# EAGLE board simplePDwithBatteryv1 (EAGLE 7.5.0)
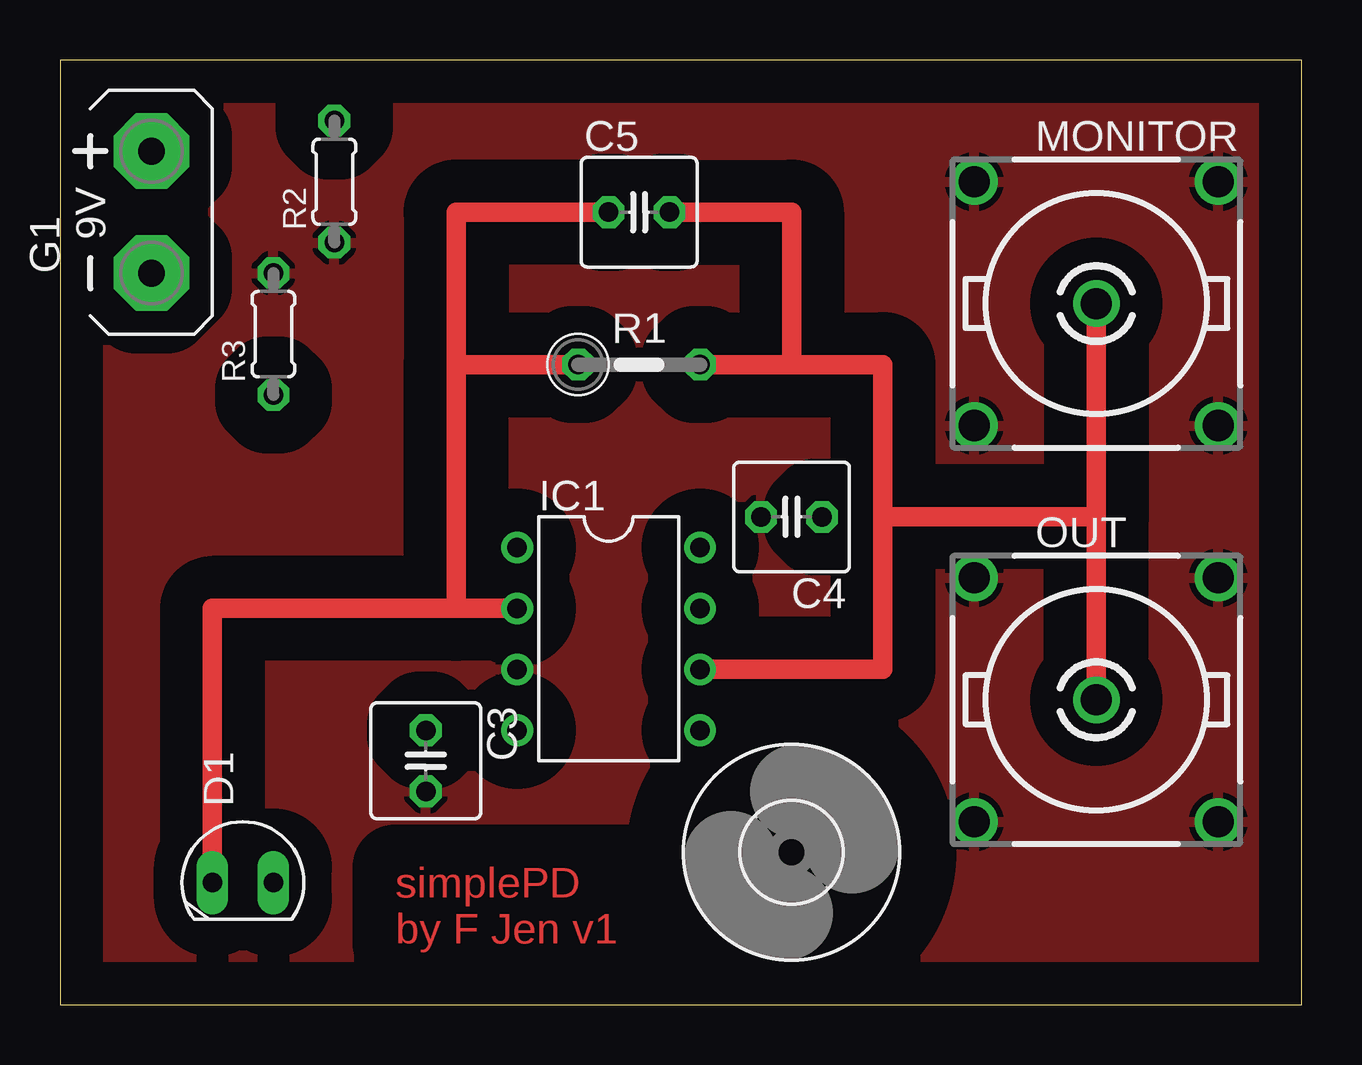
[diagram p0: board, top side]
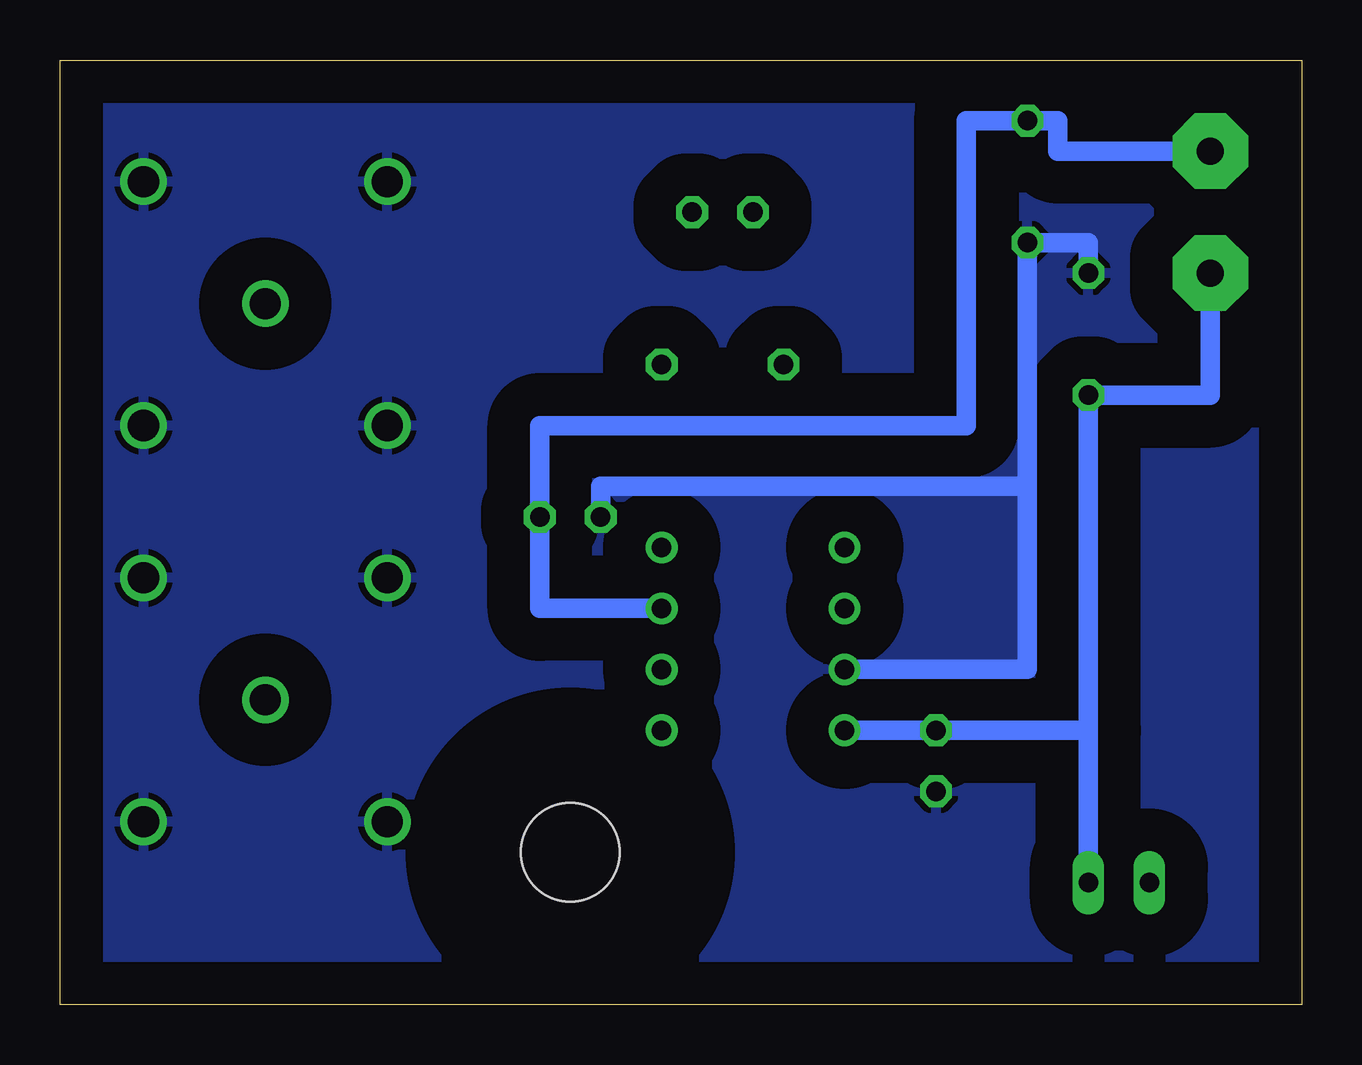
[diagram p1: board, bottom side, seen from below]

Size 51.74 x 39.36 mm. Coordinates in mm from the lower left corner, seen from the top.
Outline: 0,0 51.74,0 51.74,39.36 0,39.36 0,0
Copper layers (1*16): Top 0.035mm / dielectric 1.5mm / Bottom 0.035mm
Design rules "default": minimum track width 10mil, minimum drill 24mil, track to track 8mil, track to pad 8mil, pad to pad 8mil, via to via 8mil, smd to smd 8mil, copper to edge 40mil, drill to drill 8mil, minimum pad ring 10mil, minimum via ring 8mil, stop-mask expansion 4mil, vias tented up to drill 0mil, thermal gap 10mil

## Footprints (pad centres in the part's own frame; a part is rotated, then mirrored left to right if it is on the bottom)
C025-050X050 = drill 0.813 octagon: 1 -1.27,0; 2 1.27,0
SFH205 = drill 0.813 long: A 0,-1.27; K 0,1.27
AB9V = drill 1.118 pad 3.15 octagon: + 0,2.54; - 0,-2.54
4,1 = hole 4.1: 0,0
DIL08 = drill 0.813 pad 1.27: 1 -3.81,-3.81; 2 -1.27,-3.81; 3 1.27,-3.81; 4 3.81,-3.81; 5 3.81,3.81; 6 1.27,3.81; 7 -1.27,3.81; 8 -3.81,3.81
R141426 = drill 1.295: 1 0,0; 2 5.08,5.08; 3 -5.08,5.08; 4 -5.08,-5.08; 5 5.08,-5.08
0207/5V = drill 0.813 octagon: 1 -2.54,0; 2 2.54,0
0204/5 = drill 0.813 octagon: 1 -2.54,0; 2 2.54,0

## Placement (x,y rotation side)
C3  1nF  [C025-050X050]  15.24,10.16 270 top
C4  1nF  [C025-050X050]  30.48,20.32 180 top
C5  4,7pF  [C025-050X050]  24.13,33.02 0 top
D1  SFH205  [SFH205]  7.62,5.08 90 top
G1  AB9V  [AB9V]  3.81,33.02 0 top
H1  MOUNT-HOLE4.1  [4,1]  30.48,6.35 0 top
IC1  OP27Z  [DIL08]  22.86,15.24 270 top
MONITOR  R141426  [R141426]  43.18,29.21 0 top
OUT  R141426  [R141426]  43.18,12.7 0 top
R1  10k  [0207/5V]  24.13,26.67 0 top
R2  10k  [0204/5]  11.43,34.29 90 top
R3  10k  [0204/5]  8.89,27.94 90 top

## Library data of the parts
C3-C5 R1-R3 = resistor
D1 = opto-trans-siemens; OC_FARNELL: unknown; OC_NEWARK: unknown
G1 = battery
H1 = holes
IC1 = linear
MONITOR OUT = con-coax; MF: FARNELL; MPN: R141426161; OC_FARNELL: 4195115; OC_NEWARK: 14J7919

## Nets
GND: C3.2 C4.2 IC1.3 MONITOR.2 MONITOR.3 MONITOR.4 MONITOR.5 OUT.2 OUT.3 OUT.4 OUT.5 R2.1 R3.2
N$1: C5.1 D1.K IC1.2 R1.1
N$2: C5.2 IC1.6 MONITOR.1 OUT.1 R1.2
V+: C4.1 G1.+ IC1.7 R2.2
V-: C3.1 D1.A G1.- IC1.4 R3.1

## Tracks (layer width: path | path; a pad name or v marks a point on that pad's centre or on a via)
GND
  Bottom 0.813: IC1.3 11.43,13.97 11.43,21.59 | 11.43,21.59 R2.1 8.89,31.75 R3.2 | C4.2 29.21,21.59 11.43,21.59
  pour Top (isolate 1.778): 0,39.37 52.07,39.37 52.07,0 0,0
  pour Bottom (isolate 1.778): 0,39.37 52.07,39.37 52.07,0 0,0
N$1
  Top 0.813: IC1.2 16.51,16.51 | 16.51,16.51 16.51,26.67 | 16.51,26.67 R1.1 | C5.1 16.51,33.02 16.51,26.67 | 16.51,16.51 6.35,16.51 D1.K
N$2
  Top 0.813: R1.2 30.48,26.67 | 30.48,26.67 34.29,26.67 34.29,20.32 | 34.29,20.32 34.29,13.97 IC1.6 | C5.2 30.48,33.02 30.48,26.67 | MONITOR.1 43.18,20.32 | OUT.1 43.18,20.32 | 43.18,20.32 34.29,20.32
V+
  Bottom 0.813: IC1.7 31.75,16.51 C4.1 31.75,24.13 13.97,24.13 13.97,36.83 R2.2 10.16,36.83 10.16,35.56 G1.+
V-
  Bottom 0.813: IC1.4 C3.1 8.89,11.43 | D1.A 8.89,11.43 | 8.89,11.43 R3.1 3.81,25.4 G1.-

## Text on the board
Top: simplePD / by F Jen v1